# EAGLE board dtmf_robot (EAGLE 6.1)
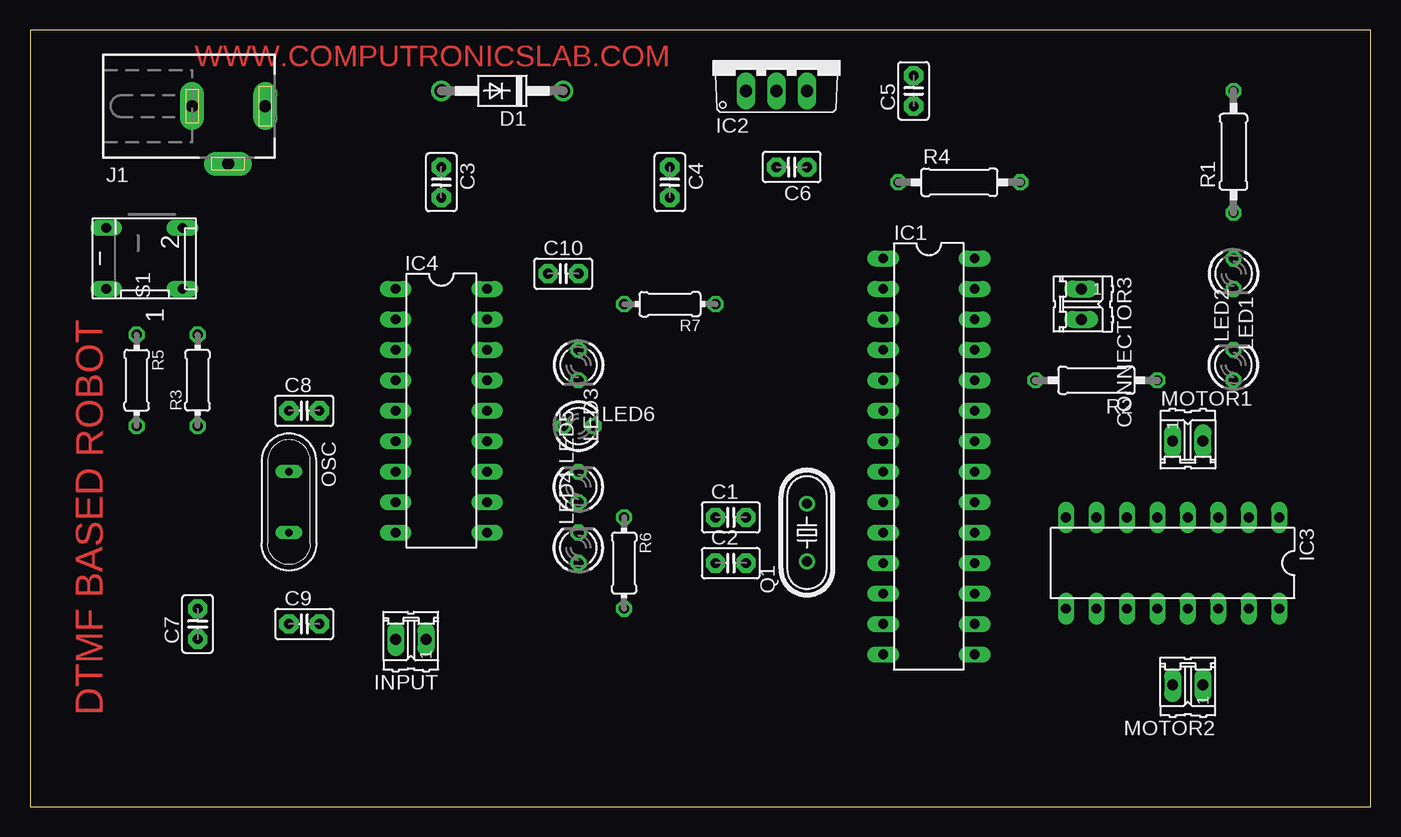
[diagram p0: board, top side]
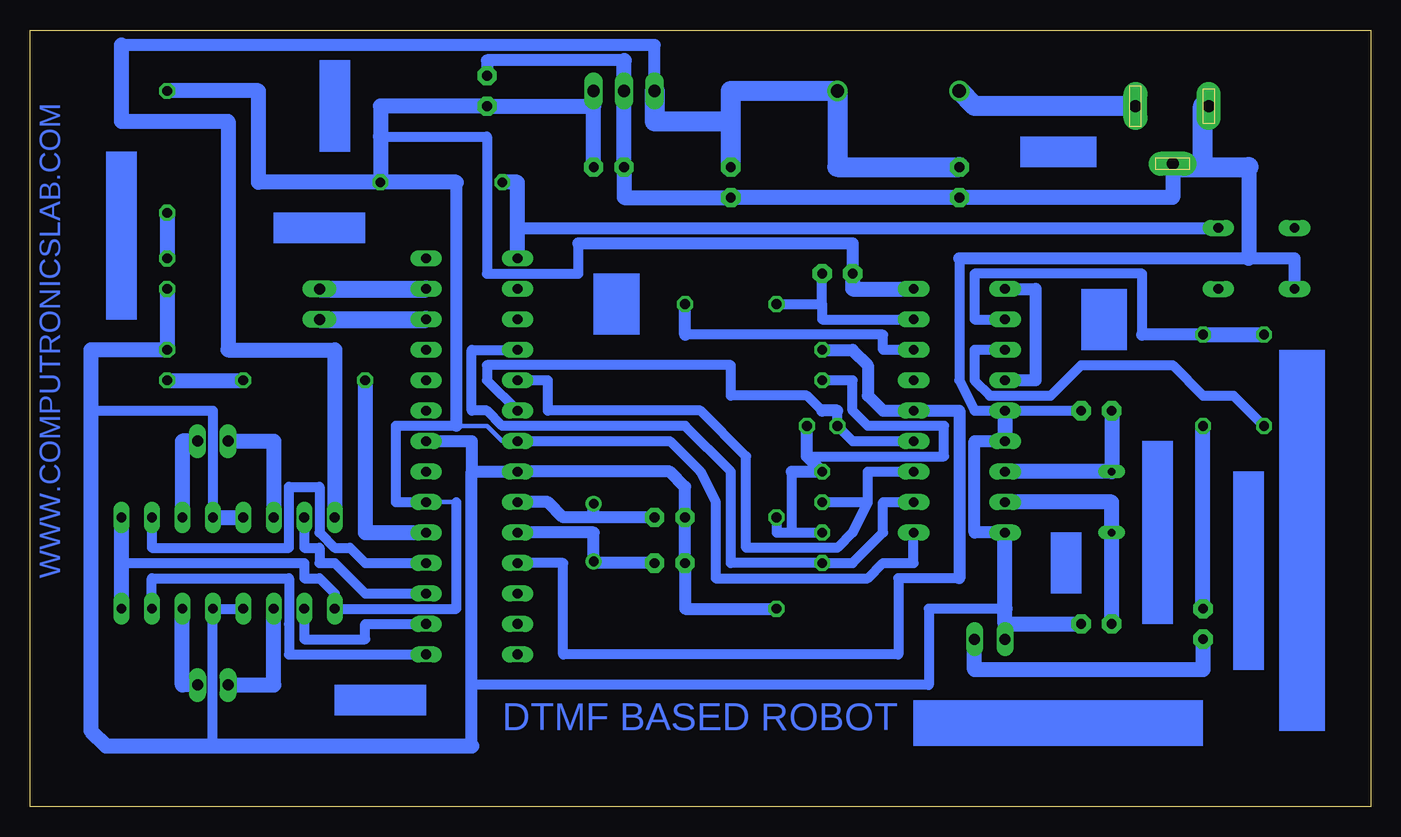
[diagram p1: board, bottom side, seen from below]

Size 111.76 x 64.76 mm. Coordinates in mm from the lower left corner, seen from the top.
Outline: 0,0 111.76,0 111.76,64.76 0,64.76 0,0
Copper layers (1*16): Top 0.035mm / dielectric 1.5mm / Bottom 0.035mm
Design rules: minimum track width 15mil, minimum drill 24mil, track to track 8mil, track to pad 8mil, pad to pad 8mil, via to via 8mil, smd to smd 8mil, copper to edge 40mil, drill to drill 8mil, minimum pad ring 10mil, minimum via ring 8mil, stop-mask expansion 4mil, vias tented up to drill 0mil, thermal gap 10mil

## Footprints (pad centres in the part's own frame; a part is rotated, then mirrored left to right if it is on the bottom)
C2.5-2 = drill 0.813 pad 1.6 octagon: 1 -1.27,0; 2 1.27,0
02P = drill 0.914 long: 1 -1.27,0; 2 1.27,0
DO41-10 = drill 1.118: A 5.08,0; C -5.08,0
DIL28-3 = drill 0.813 long: 1 -16.51,-3.81; 2 -13.97,-3.81; 3 -11.43,-3.81; 4 -8.89,-3.81; 5 -6.35,-3.81; 6 -3.81,-3.81; 7 -1.27,-3.81; 8 1.27,-3.81; 9 3.81,-3.81; 10 6.35,-3.81; 11 8.89,-3.81; 12 11.43,-3.81; 13 13.97,-3.81; 14 16.51,-3.81; 15 16.51,3.81; 16 13.97,3.81; 17 11.43,3.81; 18 8.89,3.81; 19 6.35,3.81; 20 3.81,3.81; 21 1.27,3.81; 22 -1.27,3.81; 23 -3.81,3.81; 24 -6.35,3.81; 25 -8.89,3.81; 26 -11.43,3.81; 27 -13.97,3.81; 28 -16.51,3.81
TO220V = drill 1.016 long: 1 -2.54,-2.54; 2 0,-2.54; 3 2.54,-2.54
DIL16 = drill 0.813 long: 1 -8.89,-3.81; 2 -6.35,-3.81; 3 -3.81,-3.81; 4 -1.27,-3.81; 5 1.27,-3.81; 6 3.81,-3.81; 7 6.35,-3.81; 8 8.89,-3.81; 9 8.89,3.81; 10 6.35,3.81; 11 3.81,3.81; 12 1.27,3.81; 13 -1.27,3.81; 14 -3.81,3.81; 15 -6.35,3.81; 16 -8.89,3.81
DIL18 = drill 0.813 long: 1 -10.16,-3.81; 2 -7.62,-3.81; 3 -5.08,-3.81; 4 -2.54,-3.81; 5 0,-3.81; 6 2.54,-3.81; 7 5.08,-3.81; 8 7.62,-3.81; 9 10.16,-3.81; 10 10.16,3.81; 11 7.62,3.81; 12 5.08,3.81; 13 2.54,3.81; 14 0,3.81; 15 -2.54,3.81; 16 -5.08,3.81; 17 -7.62,3.81; 18 -10.16,3.81
DCJ0303 = drill 1 pad 2 long: 1 0,3.1; 2 4.8,0; 3 0,-3
LED3MM = drill 0.813 octagon: A -1.27,0; K 1.27,0
QS = drill 0.61 long: 1 -2.54,0; 2 2.54,0
HC49/S = drill 0.813: 1 -2.413,0; 2 2.413,0
0207/10 = drill 0.813 octagon: 1 -5.08,0; 2 5.08,0
0204/7 = drill 0.813 octagon: 1 -3.81,0; 2 3.81,0
DP-02 = drill 0.813 long: 1 -2.54,-2.54; 2 2.54,-2.54; 3 2.54,3.81; 4 -2.54,3.81

## Placement (x,y rotation side)
C1  22pf  [C2.5-2]  58.42,24.13 0 top
C2  22pf  [C2.5-2]  58.42,20.32 0 top
C3  470uF  [C2.5-2]  34.29,52.07 270 top
C4  0.1uf  [C2.5-2]  53.34,52.07 270 top
C5  0.1uf  [C2.5-2]  73.66,59.69 90 top
C6  4.7uf  [C2.5-2]  63.5,53.34 180 top
C7  0.47uf  [C2.5-2]  13.97,15.24 90 top
C8  22PF  [C2.5-2]  22.86,33.02 0 top
C9  22PF  [C2.5-2]  22.86,15.24 0 top
C10  0.1UF  [C2.5-2]  44.45,44.45 0 top
CONNECTOR3  [02P]  87.63,41.91 270 top
D1  1N4007  [DO41-10]  39.37,59.69 180 top
IC1  ATMEGA328  [DIL28-3]  74.93,29.21 270 top
IC2  7805  [TO220V]  62.23,62.23 0 top
IC3  L293D  [DIL16]  95.25,20.32 180 top
IC4  CM8870CP  [DIL18]  34.29,33.02 270 top
INPUT  [02P]  31.75,13.97 180 top
J1  [DCJ0303]  16.51,58.42 270 top
LED1  3mm  [LED3MM]  100.33,44.45 270 top
LED2  3mm  [LED3MM]  100.33,36.83 90 top
LED3  3mm  [LED3MM]  45.72,36.83 270 top
LED4  3mm  [LED3MM]  45.72,21.59 90 top
LED5  3mm  [LED3MM]  45.72,26.67 90 top
LED6  3mm  [LED3MM]  45.72,31.75 0 top
MOTOR1  [02P]  96.52,30.48 0 top
MOTOR2  [02P]  96.52,10.16 180 top
OSC  3.57  [QS]  21.59,25.4 270 top
Q1  16MHZ  [HC49/S]  64.77,22.86 90 top
R1  220R  [0207/10]  100.33,54.61 90 top
R2  330R  [0207/10]  88.9,35.56 180 top
R3  10K  [0204/7]  13.97,35.56 90 top
R4  10K  [0207/10]  77.47,52.07 0 top
R5  100K  [0204/7]  8.89,35.56 270 top
R6  330E  [0204/7]  49.53,20.32 270 top
R7  10K  [0204/7]  53.34,41.91 180 top
S1  push switch  [DP-02]  10.16,45.72 90 top

## Library data of the parts
C1-C10 = capacitor-wima
CONNECTOR3 INPUT MOTOR1 MOTOR2 = con-amp-quick; OC_FARNELL: unknown; OC_NEWARK: unknown
D1 = diode
IC1 = quantum-research-group; OC_FARNELL: unknown; OC_NEWARK: unknown
IC2 = linear
IC3 = st-microelectronics; MPN: L293D; OC_FARNELL: 9589619; OC_NEWARK: 56P8249
IC4 = california-micro-devices; OC_FARNELL: unknown; OC_NEWARK: unknown
J1 = con-jack; OC_FARNELL: unknown; OC_NEWARK: unknown
LED1-LED6 = led
OSC = special
Q1 = crystal; OC_FARNELL: 1667008; OC_NEWARK: unknown
R1-R7 = rcl
S1 = switch-dil; MPN: MCDP02; OC_FARNELL: 1255233; OC_NEWARK: 26M1095

## Nets
N$1: C1.2 IC1.9 Q1.2
N$2: C2.2 IC1.10 Q1.1
N$3: D1.A J1.1
N$4: C3.1 C4.1 D1.C IC2.1 IC3.8
N$5: C1.1 C2.1 C3.2 C4.2 C5.2 C6.2 C8.2 C9.2 IC1.8 IC1.22 IC2.2 IC3.4 IC3.5 IC3.12 IC3.13 IC4.5 IC4.6 IC4.9 INPUT.2 J1.2 J1.3 LED1.K LED2.K R6.2 S1.4
N$6: LED1.A R1.1
N$7: IC1.17 IC3.7
N$8: IC1.4 IC4.11 LED4.A
N$9: IC1.5 IC4.12 LED5.A
N$10: IC1.6 IC4.13 LED6.A
N$11: IC1.11 IC4.14 LED3.A
N$12: CONNECTOR3.1 IC1.27
N$13: CONNECTOR3.2 IC1.26
N$15: IC1.18 IC3.2
N$16: IC1.15 IC3.15
N$20: C7.2 R3.1
N$21: IC1.16 IC3.10
N$24: C10.2 IC4.17 R7.2
N$25: IC3.14 MOTOR2.1
N$27: IC1.19 R2.2
N$28: IC3.11 MOTOR2.2
N$31: IC1.1 R4.1 S1.2
N$32: LED2.A R2.1
N$34: IC3.6 MOTOR1.1
N$35: IC3.3 MOTOR1.2
N$36: LED3.K LED4.K LED5.K LED6.K R6.1
N$37: C5.1 C6.1 C10.1 IC1.7 IC1.20 IC2.3 IC3.1 IC3.9 IC3.16 IC4.10 IC4.18 R1.2 R4.2
N$38: C7.1 INPUT.1
N$39: IC4.2 R3.2 R5.1
N$40: IC4.1 IC4.4
N$41: IC4.3 R5.2
N$42: C8.1 IC4.7 OSC.1
N$43: C9.1 IC4.8 OSC.2
N$44: IC4.16 R7.1

## Tracks (layer width: path | path; a pad name or v marks a point on that pad's centre or on a via)
N$1
  Bottom 1.016: C1.2 64.77,24.13 | 64.77,24.13 67.31,24.13 68.58,25.4 IC1.9 | 64.77,24.13 Q1.2
N$2
  Bottom 0.381: 64.77,20.32 Q1.1
  Bottom 1.016: C2.2 64.77,20.32 | Q1.1 64.77,22.86 IC1.10
N$3
  Bottom 1.676: D1.A 33.02,58.42 J1.1
N$4
  Bottom 1.016: 104.14,63.5 59.69,63.5 IC2.1
  Bottom 1.27: IC3.8 86.36,38.1 95.25,38.1 95.25,57.15 104.14,57.15 104.14,63.5
  Bottom 1.676: C3.1 44.45,53.34 D1.C 53.34,59.69 53.34,57.15 | IC2.1 59.69,57.15 53.34,57.15 | C4.1 53.34,57.15
N$5
  Bottom 0.381: 10.16,45.72 6.35,45.72
  Bottom 0.813: IC3.12 IC3.13 96.52,5.08 | IC3.4 96.52,33.02 106.68,33.02 | C8.2 IC4.5 33.02,33.02 34.29,35.56 34.29,45.72 | 74.93,10.16 36.83,10.16 36.83,16.51 30.48,16.51
  Bottom 1.016: IC1.22 74.93,30.48 74.93,27.94 | R6.2 57.15,16.51 C2.1 C1.1 57.15,26.67 58.42,27.94 IC1.8 74.93,27.94 | 74.93,27.94 74.93,10.16 74.93,5.08 | C5.2 73.66,62.23 62.23,62.23 | IC4.6 33.02,30.48 33.02,22.86 IC4.9 | S1.4 6.35,45.72 34.29,45.72
  Bottom 1.27: IC3.4 IC3.5 | LED1.K LED2.K 106.68,38.1 106.68,33.02 106.68,6.35 105.41,5.08 96.52,5.08 74.93,5.08 | 62.23,62.23 IC2.2 C6.2 62.23,50.8 C4.2 C3.2 16.51,50.8 16.51,53.34 J1.2 | IC4.5 IC4.6 | 30.48,15.24 30.48,16.51 IC4.9 | 30.48,15.24 C9.2 | 30.48,15.24 INPUT.2 | 10.16,53.34 10.16,45.72
  Bottom 1.676: 16.51,53.34 13.97,53.34 | 13.97,53.34 10.16,53.34 | 13.97,53.34 13.97,58.42 J1.3
N$6
  Bottom 1.27: R1.1 LED1.A
N$7
  Bottom 0.813: IC1.17 83.82,17.78 86.36,20.32 87.63,20.32 87.63,21.59 88.9,21.59 IC3.7
N$8
  Bottom 0.813: IC4.11 40.64,25.4 40.64,22.86 43.18,20.32 LED4.A 53.34,20.32 53.34,27.94 57.15,31.75 72.39,31.75 73.66,33.02 74.93,33.02 74.93,38.1 IC1.4
N$9
  Bottom 0.813: 41.91,25.4 41.91,27.94 IC4.12 | LED5.A 41.91,25.4 | IC1.5 68.58,35.56 68.58,33.02 55.88,33.02 52.07,29.21 52.07,21.59 44.45,21.59 43.18,22.86 41.91,25.4
N$10
  Bottom 0.813: IC4.13 43.18,30.48 LED6.A 44.45,33.02 | IC1.6 73.66,35.56 73.66,36.83 53.34,36.83 53.34,34.29 46.99,34.29 45.72,33.02
  Bottom 1.016: 44.45,33.02 45.72,33.02
N$11
  Bottom 0.813: IC1.11 67.31,20.32 67.31,12.7 39.37,12.7 39.37,19.05 34.29,19.05
  Bottom 1.016: LED3.A 43.18,38.1 41.91,36.83 41.91,34.29 40.64,33.02 IC4.14 34.29,33.02 34.29,19.05
N$12
  Bottom 1.422: CONNECTOR3.1 IC1.27
N$13
  Bottom 1.422: CONNECTOR3.2 IC1.26
N$15
  Bottom 0.813: IC1.18 83.82,20.32 85.09,21.59 86.36,21.59 87.63,22.86 87.63,26.67 90.17,26.67 90.17,21.59 101.6,21.59 IC3.2
N$16
  Bottom 0.813: IC1.15 87.63,12.7 90.17,12.7 90.17,15.24 90.17,19.05 101.6,19.05 IC3.15
N$20
  Bottom 1.27: C7.2 R3.1
N$21
  Bottom 0.813: IC1.16 83.82,15.24 83.82,13.97 88.9,13.97 IC3.10
N$24
  Bottom 0.813: IC4.17 45.72,40.64 45.72,41.91 | R7.2 45.72,41.91 | 45.72,41.91 C10.2
N$25
  Bottom 1.27: IC3.14 99.06,10.16 MOTOR2.1
N$27
  Bottom 1.27: IC1.19 83.82,22.86 83.82,27.94 R2.2
N$28
  Bottom 1.27: IC3.11 91.44,10.16 MOTOR2.2
N$31
  Bottom 1.016: 71.12,48.26 S1.2
  Bottom 1.27: IC1.1 71.12,48.26 71.12,52.07 R4.1
N$32
  Bottom 1.27: LED2.A R2.1
N$34
  Bottom 1.27: IC3.6 91.44,30.48 MOTOR1.1
N$35
  Bottom 1.27: IC3.3 99.06,30.48 MOTOR1.2
N$36
  Bottom 0.813: 48.26,22.86 LED4.K | R6.1 49.53,22.86 48.26,22.86 | 48.26,22.86 48.26,27.94 | LED3.K 43.18,35.56 43.18,33.02 41.91,31.75 35.56,31.75 35.56,29.21 46.99,29.21
  Bottom 1.016: 48.26,27.94 LED5.K 46.99,29.21 LED6.K
N$37
  Bottom 0.381: 76.2,25.4 IC1.20 | 76.2,31.75 73.66,31.75 72.39,30.48 IC1.7
  Bottom 0.813: 66.04,46.99 66.04,44.45 73.66,44.45 73.66,55.88 82.55,55.88 | 104.14,20.32 88.9,20.32 88.9,19.05 87.63,19.05 86.36,17.78 IC3.9 76.2,16.51 76.2,25.4 | IC4.10 38.1,20.32 40.64,20.32 41.91,19.05 54.61,19.05 54.61,25.4 55.88,27.94 58.42,30.48 IC1.7 | IC1.20 81.28,25.4 81.28,31.75 76.2,31.75
  Bottom 1.016: C10.1 43.18,46.99 66.04,46.99 | 76.2,31.75 76.2,52.07
  Bottom 1.27: IC4.18 43.18,43.18 C10.1 | C6.1 64.77,58.42 | R4.2 82.55,55.88 82.55,58.42 C5.1 64.77,58.42 | R1.2 92.71,59.69 92.71,52.07 R4.2 | 64.77,58.42 IC2.3 | IC3.1 104.14,20.32 IC3.16 | 76.2,52.07 R4.2
N$38
  Bottom 1.27: INPUT.1 33.02,11.43 13.97,11.43 C7.1
N$39
  Bottom 0.813: IC4.2 33.02,40.64 33.02,44.45 19.05,44.45 19.05,39.37
  Bottom 1.016: R3.2 19.05,39.37
  Bottom 1.27: R3.2 R5.1
N$40
  Bottom 1.016: IC4.4 27.94,35.56 27.94,43.18 IC4.1
N$41
  Bottom 0.813: R5.2 11.43,34.29 13.97,34.29 16.51,36.83 24.13,36.83 26.67,34.29 31.75,34.29 33.02,35.56 33.02,38.1 IC4.3
N$42
  Bottom 1.27: C8.1 OSC.1 IC4.7
N$43
  Bottom 1.27: C9.1 OSC.2 21.59,25.4 IC4.8
N$44
  Bottom 0.813: 57.15,39.37 40.64,39.37 40.64,38.1 IC4.16
  Bottom 1.016: 57.15,39.37 R7.1
(copper drawn outside any net)
  shapes: Bottom area x12

## Text on the board
Top: WWW.COMPUTRONICSLAB.COM | DTMF BASED ROBOT
Bottom: WWW.COMPUTRONICSLAB.COM | DTMF BASED ROBOT